# EAGLE board pcb 2D (EAGLE 9.7.0)
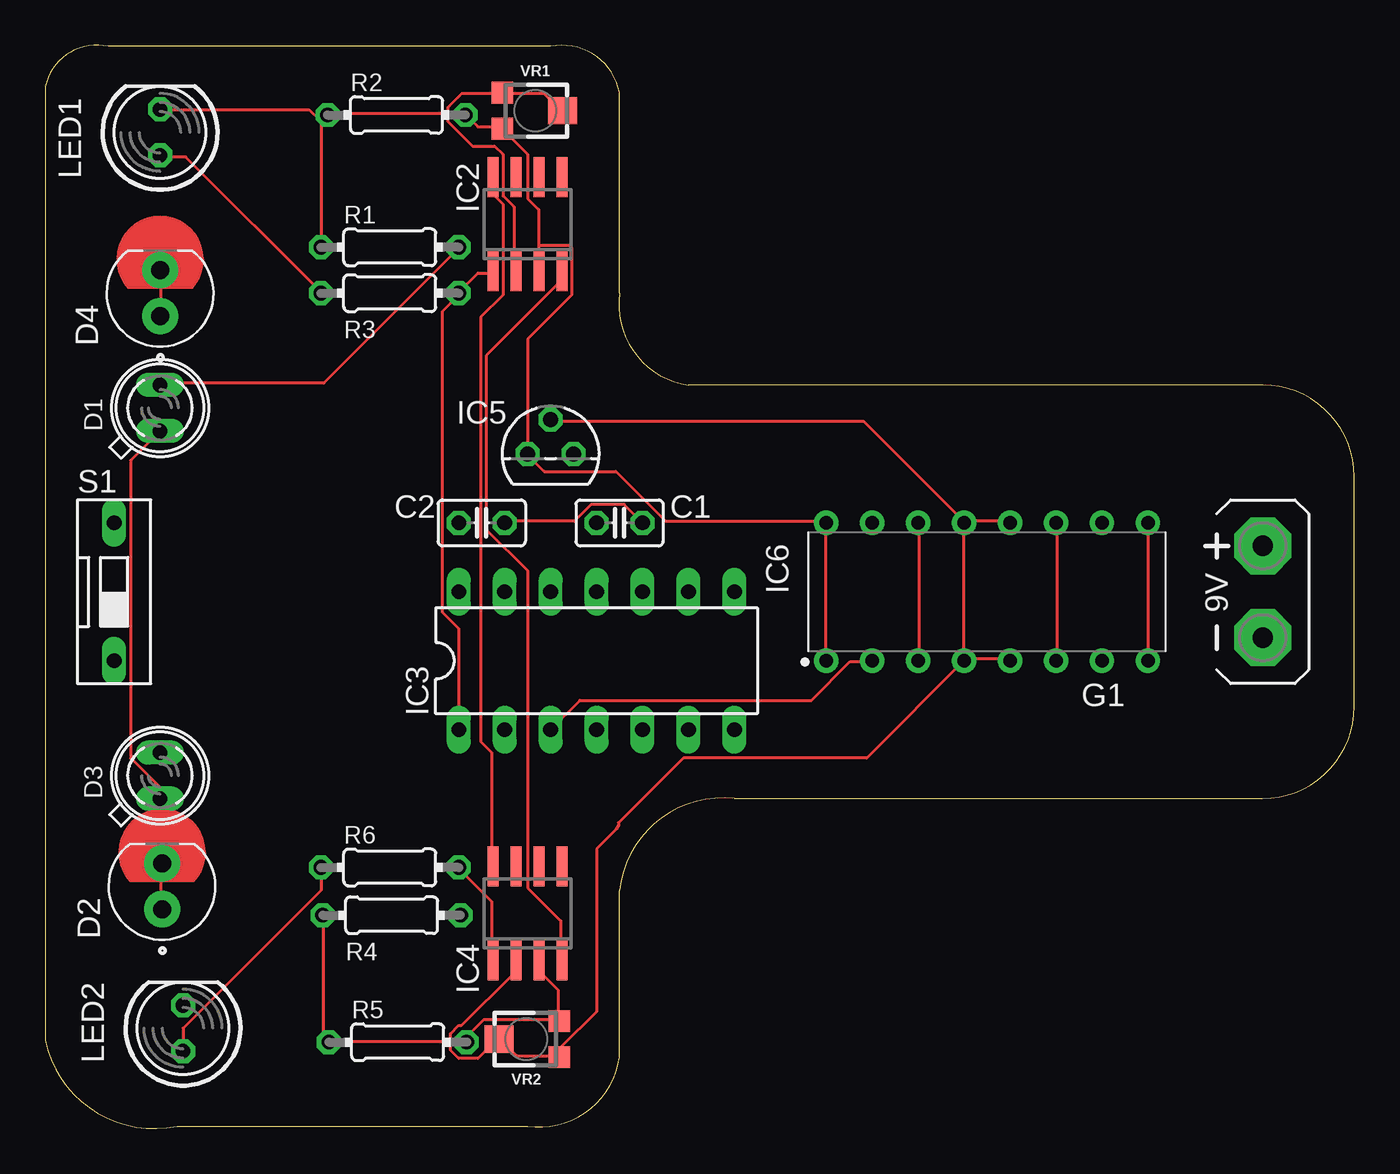
[diagram p0: board, top side]
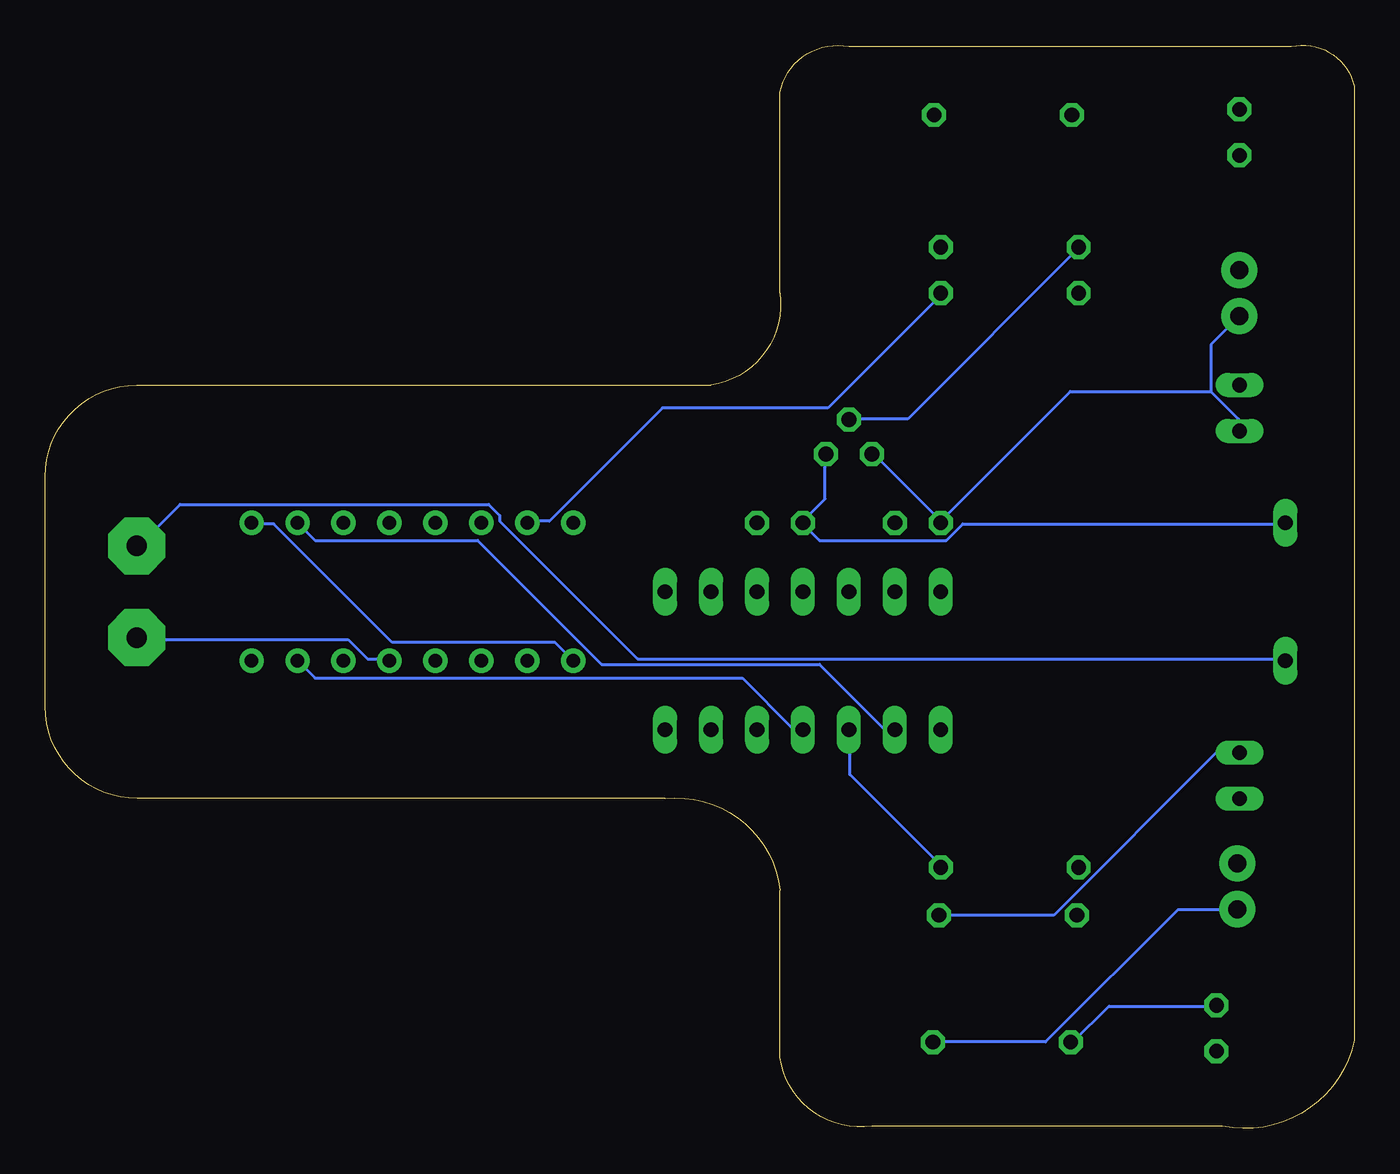
[diagram p1: board, bottom side, seen from below]

Size 72.37 x 59.89 mm. Coordinates in mm from the lower left corner, seen from the top.
Outline: 31.75,46.18 31.75,57.28 arc90 27.94,59.82 3.48,59.82 arc90 0,57.61 0,4.88 arc90 7.29,0.13 26.67,0.13 arc90 31.75,3.94 31.75,13.16 arc-90 38.1,18.24 67.29,18.24 arc90 72.37,23.32 72.37,36.04 arc90 67.31,41.1 35.56,41.1 arc-90 31.75,46.18
Copper layers (1*16): Top / Bottom
Stack-up Default Layer Stack: Top User Defined 0.035mm / Dielectric-1 User Defined 1.5mm / Bottom User Defined 0.035mm
Design rules: minimum copper width 6mil, minimum drill size 0.35mm, copper clearance wire_polygon to wire_polygon 6mil, copper clearance wire_polygon to pad_smd 6mil, copper clearance wire_polygon to via 6mil, copper clearance pad_smd to pad_smd 6mil, copper clearance pad_smd to via 6mil, copper clearance via to via 6mil, copper clearance smd to pad (same net) 6mil, copper clearance smd to via (same net) 6mil, copper clearance smd to smd (same net) 6mil, dimension clearance 40mil, restrict clearance 0mil, drill distance 6mil, keepout clearance 0mil

## Footprints (pad centres in the part's own frame; a part is rotated, then mirrored left to right if it is on the bottom)
C025-025X050 = drill 0.813 octagon: 1 -1.27,0; 2 1.27,0
SFH482 = drill 0.813 long: A -1.27,0; K 1.27,0
XDCR_SFH_213_FA = drill 1 pad 2: 1 -1.27,0; 2 1.27,0
AB9V = drill 1.118 pad 3.15 octagon: + 0,2.54; - 0,-2.54
SO08 = smd 0.6 x 2.2: 1 -1.905,-2.6; 2 -0.635,-2.6; 3 0.635,-2.6; 4 1.905,-2.6; 5 1.905,2.6; 6 0.635,2.6; 7 -0.635,2.6; 8 -1.905,2.6
DIL14 = drill 0.813 long: 1 -7.62,-3.81; 2 -5.08,-3.81; 3 -2.54,-3.81; 4 0,-3.81; 5 2.54,-3.81; 6 5.08,-3.81; 7 7.62,-3.81; 8 7.62,3.81; 9 5.08,3.81; 10 2.54,3.81; 11 0,3.81; 12 -2.54,3.81; 13 -5.08,3.81; 14 -7.62,3.81
TO92 = drill 0.813 octagon: 1 -1.27,0; 2 0,1.905; 3 1.27,0
DIP762W53P254L1969H508Q16B = drill 0.743 pad 1.343: 1 -3.81,8.89; 2 -3.81,6.35; 3 -3.81,3.81; 4 -3.81,1.27; 5 -3.81,-1.27; 6 -3.81,-3.81; 7 -3.81,-6.35; 8 -3.81,-8.89; 9 3.81,-8.89; 10 3.81,-6.35; 11 3.81,-3.81; 12 3.81,-1.27; 13 3.81,1.27; 14 3.81,3.81; 15 3.81,6.35; 16 3.81,8.89
LED5MM = drill 0.813 octagon: A -1.27,0; K 1.27,0
0204/7 = drill 0.813 octagon: 1 -3.81,0; 2 3.81,0
DS-01 = drill 0.813 long: 1 0,-3.81; 2 0,3.81
TRIMPOT-SMD-TC33X = smd 1.2 x 1.2: 1 -1,-1.825; 3 1,-1.825 | smd 1.5 x 1.6: 2 0,1.5

## Placement (x,y rotation side)
C1  10 µF  [C025-025X050]  31.75,33.48 0 top
C2  10 µF  [C025-025X050]  24.13,33.48 0 top
D1  SFH482  [SFH482]  6.35,39.83 90 top
D2  SFH_213_FA  [XDCR_SFH_213_FA]  6.46,13.39 90 top
D3  SFH482  [SFH482]  6.35,19.51 90 top
D4  SFH_213_FA  [XDCR_SFH_213_FA]  6.35,46.18 90 top
G1  AB9V  [AB9V]  67.31,29.67 0 top
IC2  LM358D  [SO08]  26.67,49.99 0 top
IC3  74LS04N  [DIL14]  30.48,25.86 0 top
IC4  LM358D  [SO08]  26.67,11.89 0 top
IC5  78L05Z  [TO92]  27.94,37.29 0 top
IC6  L293D  [DIP762W53P254L1969H508Q16B]  52.07,29.67 90 top
LED1  [LED5MM]  6.35,55.07 90 top
LED2  [LED5MM]  7.62,5.54 90 top
R1  100 Ω  [0204/7]  19.05,48.72 0 top
R2  10 kΩ  [0204/7]  19.42,56.03 0 top
R3  330 Ω  [0204/7]  19.05,46.18 0 top
R4  100 Ω  [0204/7]  19.15,11.79 0 top
R5  10 kΩ  [0204/7]  19.49,4.77 0 top
R6  330 Ω  [0204/7]  19.05,14.43 0 top
S1  DS01  [DS-01]  3.81,29.67 0 top
VR1  10k  [TRIMPOT-SMD-TC33X]  27.09,56.27 270 top
VR2  10k  [TRIMPOT-SMD-TC33X]  26.59,4.94 90 top

## Library data of the parts
C1 C2 = rcl; SPICEPREFIX: C
D1 D3 = SnapEDA Library
D2 D4 = SFH_213_FA; CHECK_PRICES: https://www.snapeda.com/parts/SFH%20213%20FA/OSRAM+Opto+Semiconductors+Inc./view-part/?ref=eda; DESCRIPTION: Photodiode 900nm 5ns 20° Radial; MF: OSRAM Opto; MP: SFH 213 FA; PACKAGE: Radial Osram Opto; PURCHASE-URL: https://www.snapeda.com/api/url_track_click_mouser/?unipart_id=232958&manufacturer=OSRAM Opto&part_name=SFH 213 FA&search_term=photodiode; RS_COMPONENTS_70339007_PURCHASE_URL: https://www.snapeda.com/api/url_track_click/https%253A//us.rs-online.com/product/osram-opto-semiconductors/sfh-213-fa/70339007/%253Futm_source%253DSnapEDA%2526utm_medium%253Dpart_sourcing%2526utm_campaign%253Dpartsourcing_SnapEDA_IMP_EX_GR/?unipart_id=232958&manufacturer=OSRAM Opto&part_name=SFH 213 FA&search_term=photodiode; SNAPEDA_LINK: https://www.snapeda.com/parts/SFH%20213%20FA/OSRAM+Opto+Semiconductors+Inc./view-part/?ref=snap
G1 = battery
IC2 IC4 IC5 = linear
IC3 = 74xx-eu
IC6 = IC_Power-Management; CATEGORY: IC_Linear; DESCRIPTION: IC MTRDRV BIPLR 4.5-36V 16PWRDIP; MANUFACTURER: STMicroelectronics; MPN: L293D; OPERATING_TEMP: -40°C ~ 150°C; PART_STATUS: Active; ROHS_COMPLIANT: ROHS3 Compliant; SERIES: L293; SUB-CATEGORY: Motor Driver; TYPE: Bipolar
LED1 LED2 = led
R1-R6 = rcl; SPICEPREFIX: R
S1 = Switch; CATEGORY: SWITCH; TYPE: SPST
VR1 VR2 = SparkFun-Resistors; PROD_ID: RES-12428, RES-08048

## Nets
0: G1.- IC2.2 IC4.2 IC5.2 IC6.4 IC6.5 IC6.12 IC6.13 LED1.K LED2.K R1.1 R2.1 R4.1 R5.1 VR1.1 VR1.2 VR2.1 VR2.2
GND: IC3.7
N$1: C1.1 IC5.3 S1.2
N$2: C2.1 D1.A D2.1 D2.2 D3.A D4.1 D4.2 IC2.3 IC4.3 IC5.1 IC6.1 IC6.8 IC6.9 IC6.16 R2.2 R5.2 VR1.3 VR2.3
N$3: C1.2 C2.2
N$4: IC3.2 IC6.10
N$5: IC3.4 IC6.7
N$6: IC6.3 IC6.14
N$7: D1.K R1.2
N$8: G1.+ S1.1
N$10: IC6.6 IC6.11
N$11: LED1.A R3.1
N$12: LED2.A R6.1
N$13: D3.K R4.2
N$18: IC2.1 IC3.1 IC6.15 R3.2
N$19: IC3.3 IC4.1 IC6.2 R6.2
V+: IC2.8 IC4.8
V-: IC2.4 IC4.4
VCC: IC3.14

## Tracks (layer width: path | path; a pad name or v marks a point on that pad's centre or on a via)
0
  Top 0.152: VR1.2 28.5,56.29 27.58,57.2 25.3,57.2 VR1.1 25.15,57.2 23.01,57.2 22.25,56.44 22.25,56.14 | 22.25,56.14 22.25,55.68 23.62,54.31 24.84,54.31 25.3,53.85 25.3,51.57 25.91,50.96 25.91,47.45 IC2.2 | 15.24,55.68 R1.1 | 15.24,55.68 15.54,55.98 R2.1 | 15.24,55.68 14.63,56.29 6.4,56.29 LED1.K | 15.24,55.68 R2.1 | 22.25,56.14 15.7,56.14 R2.1 | 22.4,4.78 22.4,4.32 22.86,3.86 23.93,3.86 24.99,4.93 VR2.2 25.15,4.93 26.06,4.02 28.35,4.02 VR2.1 28.5,4.02 28.5,4.47 30.48,6.45 30.48,15.45 31.56,16.52 31.69,16.76 31.69,16.89 35.27,20.48 45.41,20.48 IC6.4 | 22.4,4.78 22.4,5.24 22.86,5.69 23.01,5.69 25.91,8.59 25.91,9.2 IC4.2 | 22.4,4.78 15.7,4.78 R5.1 15.54,4.78 15.39,4.93 15.39,11.64 R4.1 | IC6.4 50.9,25.96 53.34,25.96 IC6.5 | IC6.13 50.9,33.58 53.34,33.58 IC6.12 | IC6.4 50.75,25.96 50.75,33.43 IC6.13 | IC5.2 28.04,39.07 45.26,39.07 50.75,33.58 IC6.13
  Bottom 0.152: IC5.2 27.89,39.22 24.69,39.22 15.24,48.67 R1.1 | LED2.K 7.62,6.76 13.56,6.76 15.54,4.78 R5.1 | IC6.5 53.34,25.96 54.56,25.96 55.63,27.03 67.21,27.03 G1.-
N$1
  Bottom 0.152: S1.2 3.81,33.43 21.64,33.43 22.55,32.52 29.57,32.52 30.48,33.43 C1.1 30.48,33.58 29.26,34.8 29.26,37.24 IC5.3
N$2
  Top 0.152: 28.35,6 28.35,7.67 27.43,8.59 27.43,9.2 IC4.3 | 28.35,6 24.23,6 23.32,5.08 23.32,4.78 R5.2 | 28.35,6 VR2.3 | D2.1 6.4,12.25 6.4,14.53 D2.2 6.4,14.68 6.4,18.19 D3.A 6.25,18.34 6.25,18.95 4.72,20.48 4.72,36.93 D1.A | D4.2 6.4,47.45 6.4,45.01 D4.1 | IC6.9 IC6.8 | IC6.1 43.13,25.96 43.13,33.43 IC6.16 43.13,33.58 34.29,33.58 31.55,36.33 27.58,36.33 26.67,37.24 IC5.1 26.67,43.64 29.11,46.08 29.11,48.67 28.96,48.82 27.28,48.82 | R2.2 23.32,55.98 23.93,55.38 25.15,55.38 VR1.3 25.3,55.22 26.67,53.85 26.67,51.41 27.28,50.8 27.28,48.82 | 27.28,48.82 27.28,47.45 IC2.3
  Bottom 0.152: R5.2 23.16,4.78 17.07,4.78 9.75,12.09 6.55,12.09 D2.1 | 7.92,40.74 6.4,39.22 6.4,38.61 D1.A | 7.92,40.74 7.92,43.34 D4.1 | 22.86,33.58 26.67,37.39 IC5.1 | IC6.1 44.2,26.88 53.19,26.88 59.74,33.43 60.96,33.43 IC6.9 | 7.92,40.74 15.7,40.74 22.86,33.58 | 22.86,33.58 C2.1
N$3
  Top 0.152: C1.2 32,34.5 30.18,34.5 29.26,33.58 25.45,33.58 C2.2
N$4
  Bottom 0.152: IC6.10 57.45,32.52 48.46,32.52 41.6,25.66 29.57,25.66 26.06,22.15 25.45,22.15 IC3.2
N$5
  Bottom 0.152: IC6.7 57.45,24.9 33.83,24.9 31.09,22.15 30.48,22.15 IC3.4
N$6
  Top 0.152: IC6.3 48.31,25.96 48.31,33.43 IC6.14
N$7
  Top 0.152: D1.K 6.4,41.2 15.39,41.2 22.86,48.67 R1.2
N$8
  Bottom 0.152: S1.1 3.81,25.96 39.62,25.96 47.24,33.58 47.24,33.89 47.85,34.5 64.92,34.5 67.21,32.21 G1.+
N$10
  Top 0.152: IC6.6 55.93,25.96 55.93,33.43 IC6.11
N$11
  Top 0.152: LED1.A 6.4,53.7 7.77,53.7 15.24,46.23 R3.1
N$12
  Top 0.152: LED2.A 7.62,5.54 15.24,13.16 R6.1
N$13
  Bottom 0.152: D3.K 7.62,20.78 16.61,11.79 22.86,11.79 R4.2
N$18
  Top 0.152: IC2.1 24.69,47.3 23.93,47.3 22.86,46.23 R3.2 22.86,46.08 21.95,45.16 21.95,28.55 22.86,27.64 IC3.1
  Bottom 0.152: IC6.15 45.72,33.58 44.5,33.58 38.25,39.83 29.11,39.83 22.86,46.08 R3.2
N$19
  Top 0.152: IC4.1 24.69,9.35 24.69,12.55 22.86,14.38 R6.2 | IC3.3 29.57,23.68 42.37,23.68 44.5,25.81 45.72,25.81 IC6.2
  Bottom 0.152: IC3.3 27.89,22 27.89,19.56 22.86,14.53 R6.2
V+
  Top 0.152: IC4.8 24.69,14.53 24.69,20.78 24.08,21.39 24.08,44.86 25.3,46.08 25.3,51.11 24.84,51.57 24.84,52.48 IC2.8
V-
  Top 0.152: IC4.4 28.5,9.35 28.5,11.48 26.67,13.31 26.67,30.84 24.38,33.12 24.38,42.73 28.5,46.84 28.5,47.3 IC2.4